# Altium PCB PCB_CONCENTRADOR.PcbDoc (part 3 of 3)
Units mm, origin at the board's own origin, x right, y up, seen from the top; angles counter-clockwise.
Board outline 90 x 100 mm, 2 copper layers (Top Layer, Bottom Layer); 69 components, 66 nets, 271 pads, 23 vias.
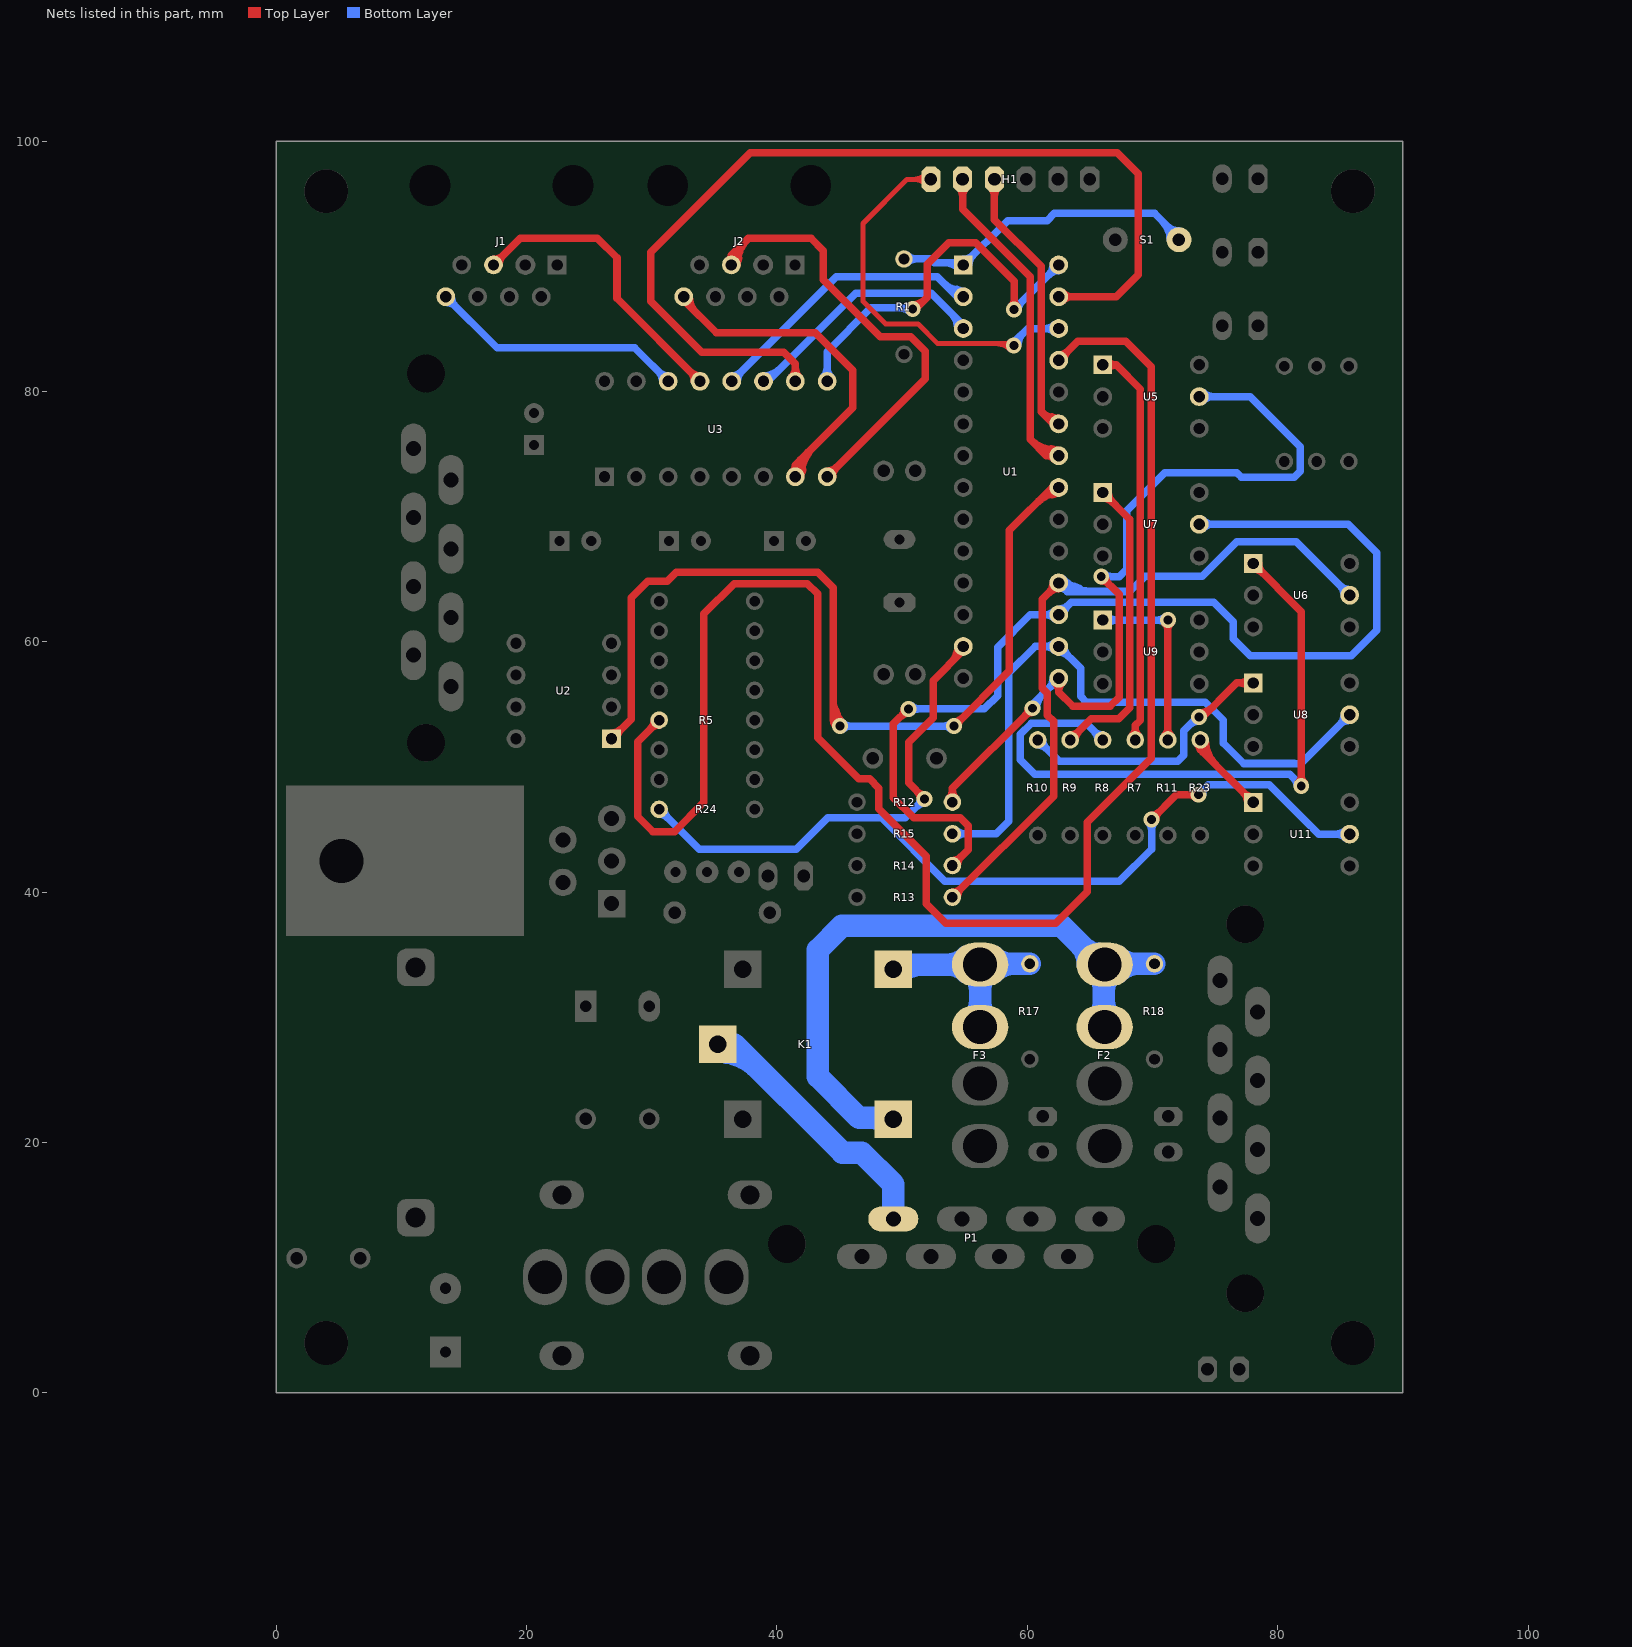
[diagram p3: the nets of this part, all layers, seen from the top]

## Via types
v1: diameter 1.27, hole 0.711, Top Layer to Bottom Layer, 22 vias
v2: diameter 2, hole 1, Top Layer to Bottom Layer, 1 vias

## Nets (pads, with @x,y where several pads share a name; then routed paths per layer and width w, separated by ;. In a path a pad name is that pad's centre, name@x,y a point inside that pad or via, vN(x,y) a via of type N, cw(c..) or ccw(c..) an arc to the next point about the centre after c; other vN are vias at no path point) (continued)
NetR1_2: R1.2 S1.2 U1.1 | length 51
  Bottom Layer w0.6: R1.2@50.15,90.585 52.272,90.585 52.557,90.3 54.7,90.3 U1.1@54.89,90.11 58.43,93.65 61.599,93.65 62.174,94.225 70.165,94.225 S1.2@72.115,92.275 ; R1.2@50.433,90.302 cw(c51.116,89.619) 51.116,90.585 ; R1.2@50.433,90.302 cw(c51.116,89.619) 51.116,90.585 ; R1.2@50.433,90.302 cw(c51.116,89.619) 51.116,90.585 ; R1.2@50.433,90.868 ccw(c51.116,91.551) 51.116,90.585 ; R1.2@50.433,90.868 ccw(c51.116,91.551) 51.116,90.585 ; R1.2@50.433,90.868 ccw(c51.116,91.551) 51.116,90.585 ; 53.345,90.3 cw(c53.345,88.565) U1.1@54.572,89.792 ; 53.345,90.3 cw(c53.345,88.565) U1.1@54.572,89.792 ; 53.345,90.3 cw(c53.345,88.565) U1.1@54.572,89.792 ; U1.1@54.89,90.56 ccw(c54.89,91.646) 55.658,90.878 ; U1.1@54.89,90.56 ccw(c54.89,91.646) 55.658,90.878 ; U1.1@54.89,90.56 ccw(c54.89,91.646) 55.658,90.878 ; U1.1@55.34,90.11 cw(c56.426,90.11) 55.658,90.878 ; U1.1@55.34,90.11 cw(c56.426,90.11) 55.658,90.878 ; U1.1@55.34,90.11 cw(c56.426,90.11) 55.658,90.878 ; 70.814,93.576 cw(c69.363,92.125) S1.2@71.415,92.125 ; 70.814,93.576 cw(c69.363,92.125) S1.2@71.415,92.125 ; 70.814,93.576 cw(c69.363,92.125) S1.2@71.415,92.125 ; 71.109,93.265 ccw(c72.542,93.649) S1.2@72.142,92.221 ; 71.109,93.265 ccw(c72.542,93.649) S1.2@72.142,92.221 ; 71.109,93.265 ccw(c72.542,93.649) S1.2@72.142,92.221 ; 71.176,93.214 ccw(c72.115,94.153) S1.2@72.115,92.825 ; 71.176,93.214 ccw(c72.115,94.153) S1.2@72.115,92.825 ; 71.176,93.214 ccw(c72.115,94.153) S1.2@72.115,92.825
NetR7_1: R7.1 U5.1 | length 41.5
  Top Layer w0.6: U5.1@66.033,82.128 67.097,82.128 ; R7.1@68.628,52.165 68.628,53.328 69.045,53.745 69.045,80.18 67.097,82.128 ; U5.1@66.355,81.814 cw(c67.097,81.094) 67.097,82.128 ; U5.1@66.355,81.814 cw(c67.097,81.094) 67.097,82.128 ; U5.1@66.355,81.814 cw(c67.097,81.094) 67.097,82.128 ; U5.1@66.355,82.441 ccw(c67.097,83.162) 67.097,82.128 ; U5.1@66.355,82.441 ccw(c67.097,83.162) 67.097,82.128 ; U5.1@66.355,82.441 ccw(c67.097,83.162) 67.097,82.128 ; R7.1@68.345,52.448 ccw(c67.663,53.131) 68.628,53.131 ; R7.1@68.345,52.448 ccw(c67.663,53.131) 68.628,53.131 ; R7.1@68.345,52.448 ccw(c67.663,53.131) 68.628,53.131 ; 68.628,53.131 ccw(c69.594,53.131) R7.1@68.911,52.448 ; 68.628,53.131 ccw(c69.594,53.131) R7.1@68.911,52.448 ; 68.628,53.131 ccw(c69.594,53.131) R7.1@68.911,52.448
NetR8_1: R8.1 U6.1 | length 69.5
  Top Layer w0.6: U6.1@78.048,66.264 81.889,62.423 v1(81.889,48.498) ; U6.1@78.048,65.814 cw(c78.048,64.728) 78.816,65.496 ; U6.1@78.048,65.814 cw(c78.048,64.728) 78.816,65.496 ; U6.1@78.048,65.814 cw(c78.048,64.728) 78.816,65.496 ; U6.1@78.498,66.264 ccw(c79.584,66.264) 78.816,65.496 ; U6.1@78.498,66.264 ccw(c79.584,66.264) 78.816,65.496 ; U6.1@78.498,66.264 ccw(c79.584,66.264) 78.816,65.496 ; v1@81.652,48.735 ccw(c81.08,49.307) 81.889,49.307 ; v1@81.652,48.735 ccw(c81.08,49.307) 81.889,49.307 ; v1@81.652,48.735 ccw(c81.08,49.307) 81.889,49.307 ; 81.889,49.307 ccw(c82.698,49.307) v1@82.126,48.735 ; 81.889,49.307 ccw(c82.698,49.307) v1@82.126,48.735 ; 81.889,49.307 ccw(c82.698,49.307) v1@82.126,48.735
  Bottom Layer w0.6: R8.1@66.03,52.165 64.695,53.5 60.339,53.5 59.45,52.611 59.45,50.575 60.6,49.425 74.115,49.425 74.119,49.429 80.958,49.429 v1(81.889,48.498) ; 65.347,52.848 cw(c64.664,52.165) R8.1@65.63,52.165 ; 65.347,52.848 ccw(c66.03,53.531) R8.1@66.03,52.565 ; 65.347,52.848 ccw(c66.03,53.531) R8.1@66.03,52.565 ; 65.347,52.848 cw(c64.664,52.165) R8.1@65.63,52.165 ; 65.347,52.848 ccw(c66.03,53.531) R8.1@66.03,52.565 ; 65.347,52.848 cw(c64.664,52.165) R8.1@65.63,52.165 ; 81.317,49.07 cw(c80.745,48.498) v1@81.554,48.498 ; 81.317,49.07 ccw(c81.889,49.642) v1@81.889,48.833 ; 81.317,49.07 ccw(c81.889,49.642) v1@81.889,48.833 ; 81.317,49.07 cw(c80.745,48.498) v1@81.554,48.498 ; 81.317,49.07 ccw(c81.889,49.642) v1@81.889,48.833 ; 81.317,49.07 cw(c80.745,48.498) v1@81.554,48.498
NetR9_1: R9.1 U7.1 | length 33.6
  Top Layer w0.6: R9.1@63.431,52.165 65.116,53.85 67.294,53.85 68.191,54.746 68.191,69.774 U7.1@66.033,71.932 ; R9.1@63.431,52.565 ccw(c63.431,53.531) 64.114,52.848 ; R9.1@63.431,52.565 ccw(c63.431,53.531) 64.114,52.848 ; R9.1@63.431,52.565 ccw(c63.431,53.531) 64.114,52.848 ; R9.1@63.831,52.165 cw(c64.797,52.165) 64.114,52.848 ; R9.1@63.831,52.165 cw(c64.797,52.165) 64.114,52.848 ; R9.1@63.831,52.165 cw(c64.797,52.165) 64.114,52.848 ; U7.1@66.033,71.482 cw(c66.033,70.396) 66.801,71.164 ; U7.1@66.033,71.482 cw(c66.033,70.396) 66.801,71.164 ; U7.1@66.033,71.482 cw(c66.033,70.396) 66.801,71.164 ; U7.1@66.483,71.932 ccw(c67.569,71.932) 66.801,71.164 ; U7.1@66.483,71.932 ccw(c67.569,71.932) 66.801,71.164 ; U7.1@66.483,71.932 ccw(c67.569,71.932) 66.801,71.164
NetR10_1: R10.1 U8.1 | length 38.1
  Top Layer w0.6: v1(73.729,54) 73.729,53.814 73.786,53.756 76.751,56.721 U8.1@78.048,56.721 ; v1@73.729,54.335 ccw(c73.729,55.872) 74.815,54.785 ; v1@73.729,54.335 ccw(c73.729,55.872) 74.815,54.785 ; v1@73.729,54.335 ccw(c73.729,55.872) 74.815,54.785 ; 76.961,56.721 cw(c76.961,55.635) U8.1@77.729,56.403 ; 76.961,56.721 ccw(c76.961,57.807) U8.1@77.729,57.039 ; 76.961,56.721 ccw(c76.961,57.807) U8.1@77.729,57.039 ; 76.961,56.721 cw(c76.961,55.635) U8.1@77.729,56.403 ; 76.961,56.721 ccw(c76.961,57.807) U8.1@77.729,57.039 ; 76.961,56.721 cw(c76.961,55.635) U8.1@77.729,56.403
  Bottom Layer w0.6: R10.1@60.833,52.165 62.548,50.45 72.004,50.45 72.5,50.946 72.5,52.9 73.356,53.756 73.786,53.756 73.729,53.814 v1(73.729,54) ; R10.1@60.833,51.765 cw(c60.833,50.799) 61.516,51.482 ; R10.1@60.833,51.765 cw(c60.833,50.799) 61.516,51.482 ; R10.1@60.833,51.765 cw(c60.833,50.799) 61.516,51.482 ; R10.1@61.233,52.165 ccw(c62.199,52.165) 61.516,51.482 ; R10.1@61.233,52.165 ccw(c62.199,52.165) 61.516,51.482 ; R10.1@61.233,52.165 ccw(c62.199,52.165) 61.516,51.482 ; 72.937,53.337 cw(c73.729,52.546) v1@73.729,53.665 ; 72.937,53.337 cw(c73.729,52.546) v1@73.729,53.665 ; 72.937,53.337 cw(c73.729,52.546) v1@73.729,53.665
NetR11_1: R11.1 U9.1 | length 32.1
  Top Layer w0.6: R11.1@71.227,52.165 v1(71.227,61.737) ; R11.1@70.944,52.448 ccw(c70.261,53.131) 71.227,53.131 ; R11.1@70.944,52.448 ccw(c70.261,53.131) 71.227,53.131 ; R11.1@70.944,52.448 ccw(c70.261,53.131) 71.227,53.131 ; v1@70.99,61.5 cw(c70.418,60.928) 71.227,60.928 ; v1@70.99,61.5 cw(c70.418,60.928) 71.227,60.928 ; v1@70.99,61.5 cw(c70.418,60.928) 71.227,60.928 ; 71.227,53.131 ccw(c72.192,53.131) R11.1@71.509,52.448 ; 71.227,53.131 ccw(c72.192,53.131) R11.1@71.509,52.448 ; 71.227,53.131 ccw(c72.192,53.131) R11.1@71.509,52.448 ; 71.227,60.928 cw(c72.035,60.928) v1@71.464,61.5 ; 71.227,60.928 cw(c72.035,60.928) v1@71.464,61.5 ; 71.227,60.928 cw(c72.035,60.928) v1@71.464,61.5
  Bottom Layer w0.6: U9.1@66.033,61.737 v1(71.227,61.737) ; U9.1@66.351,61.419 cw(c67.119,60.651) 67.119,61.737 ; U9.1@66.351,61.419 cw(c67.119,60.651) 67.119,61.737 ; U9.1@66.351,61.419 cw(c67.119,60.651) 67.119,61.737 ; U9.1@66.351,62.055 ccw(c67.119,62.823) 67.119,61.737 ; U9.1@66.351,62.055 ccw(c67.119,62.823) 67.119,61.737 ; U9.1@66.351,62.055 ccw(c67.119,62.823) 67.119,61.737 ; 70.418,61.737 cw(c70.418,60.928) v1@70.99,61.5 ; 70.418,61.737 ccw(c70.418,62.546) v1@70.99,61.974 ; 70.418,61.737 ccw(c70.418,62.546) v1@70.99,61.974 ; 70.418,61.737 cw(c70.418,60.928) v1@70.99,61.5 ; 70.418,61.737 ccw(c70.418,62.546) v1@70.99,61.974 ; 70.418,61.737 cw(c70.418,60.928) v1@70.99,61.5
NetR23_1: R23.1 U11.1 | length 24.8
  Top Layer w0.6: R23.1@73.825,52.165 73.825,51.401 ; U11.1@78.048,47.178 73.825,51.401 ; R23.1@73.597,51.836 cw(c73.295,51.401) 73.825,51.401 ; R23.1@73.597,51.836 cw(c73.295,51.401) 73.825,51.401 ; R23.1@73.597,51.836 cw(c73.295,51.401) 73.825,51.401 ; R23.1@73.625,52.165 ccw(c74.988,52.165) 74.024,51.201 ; R23.1@73.625,52.165 ccw(c74.988,52.165) 74.024,51.201 ; R23.1@73.625,52.165 ccw(c74.988,52.165) 74.024,51.201 ; 73.825,51.401 cw(c74.356,51.401) R23.1@74.053,51.836 ; 73.825,51.401 cw(c74.356,51.401) R23.1@74.053,51.836 ; 73.825,51.401 cw(c74.356,51.401) R23.1@74.053,51.836 ; R23.1@74.225,52.165 ccw(c77.036,52.165) 75.048,50.177 ; R23.1@74.225,52.165 ccw(c77.036,52.165) 75.048,50.177 ; R23.1@74.225,52.165 ccw(c77.036,52.165) 75.048,50.177 ; 77.279,47.946 cw(c76.511,47.178) U11.1@77.598,47.178 ; 77.279,47.946 ccw(c78.048,48.714) U11.1@78.048,47.628 ; 77.279,47.946 ccw(c78.048,48.714) U11.1@78.048,47.628 ; 77.279,47.946 cw(c76.511,47.178) U11.1@77.598,47.178 ; 77.279,47.946 ccw(c78.048,48.714) U11.1@78.048,47.628 ; 77.279,47.946 cw(c76.511,47.178) U11.1@77.598,47.178
OPTO2: R12.2 U1.15 U5.7 | length 99.4
  Top Layer w0.6: R12.2@54.02,47.2 54.02,48.29 v1(60.426,54.696) ; U1.15@62.51,57.09 62.51,55.99 63.625,54.875 66.625,54.875 67.337,55.587 67.337,63.787 v1(65.912,65.211) ; R12.2@53.737,47.483 ccw(c53.054,48.166) 54.02,48.166 ; R12.2@53.737,47.483 ccw(c53.054,48.166) 54.02,48.166 ; R12.2@53.737,47.483 ccw(c53.054,48.166) 54.02,48.166 ; 54.02,48.166 ccw(c54.986,48.166) R12.2@54.303,47.483 ; 54.02,48.166 ccw(c54.986,48.166) R12.2@54.303,47.483 ; 54.02,48.166 ccw(c54.986,48.166) R12.2@54.303,47.483 ; 59.854,54.124 cw(c60.426,53.552) v1@60.426,54.361 ; 59.854,54.124 ccw(c59.282,54.696) v1@60.091,54.696 ; 59.854,54.124 ccw(c59.282,54.696) v1@60.091,54.696 ; 59.854,54.124 cw(c60.426,53.552) v1@60.426,54.361 ; 59.854,54.124 ccw(c59.282,54.696) v1@60.091,54.696 ; 59.854,54.124 cw(c60.426,53.552) v1@60.426,54.361 ; U1.15@62.192,56.772 cw(c61.424,56.004) 62.51,56.004 ; U1.15@62.192,56.772 cw(c61.424,56.004) 62.51,56.004 ; U1.15@62.192,56.772 cw(c61.424,56.004) 62.51,56.004 ; 62.51,56.004 cw(c63.596,56.004) U1.15@62.828,56.772 ; 62.51,56.004 cw(c63.596,56.004) U1.15@62.828,56.772 ; 62.51,56.004 cw(c63.596,56.004) U1.15@62.828,56.772 ; v1@65.912,64.876 cw(c65.912,64.068) 66.484,64.64 ; v1@65.912,64.876 cw(c65.912,64.068) 66.484,64.64 ; v1@65.912,64.876 cw(c65.912,64.068) 66.484,64.64 ; v1@66.247,65.211 ccw(c67.056,65.211) 66.484,64.64 ; v1@66.247,65.211 ccw(c67.056,65.211) 66.484,64.64 ; v1@66.247,65.211 ccw(c67.056,65.211) 66.484,64.64
  Bottom Layer w0.6: v1(60.426,54.696) 60.426,55.006 U1.15@62.51,57.09 ; v1(65.912,65.211) 67.336,65.211 67.944,65.819 67.944,70.469 71,73.525 76.725,73.525 77.114,73.136 81.311,73.136 81.813,73.638 81.813,75.6 77.825,79.588 U5.7@73.738,79.588 ; v1@60.761,54.696 cw(c62.318,54.696) 61.217,55.797 ; v1@60.761,54.696 cw(c62.318,54.696) 61.217,55.797 ; v1@60.761,54.696 cw(c62.318,54.696) 61.217,55.797 ; 61.742,56.322 cw(c62.51,55.554) U1.15@62.51,56.64 ; 61.742,56.322 ccw(c60.974,57.09) U1.15@62.06,57.09 ; 61.742,56.322 ccw(c60.974,57.09) U1.15@62.06,57.09 ; 61.742,56.322 cw(c62.51,55.554) U1.15@62.51,56.64 ; 61.742,56.322 ccw(c60.974,57.09) U1.15@62.06,57.09 ; 61.742,56.322 cw(c62.51,55.554) U1.15@62.51,56.64 ; v1@66.149,64.975 cw(c66.721,64.403) 66.721,65.211 ; v1@66.149,64.975 cw(c66.721,64.403) 66.721,65.211 ; v1@66.149,64.975 cw(c66.721,64.403) 66.721,65.211 ; v1@66.149,65.448 ccw(c66.721,66.02) 66.721,65.211 ; v1@66.149,65.448 ccw(c66.721,66.02) 66.721,65.211 ; v1@66.149,65.448 ccw(c66.721,66.02) 66.721,65.211 ; U5.7@74.057,79.27 cw(c74.825,78.502) 74.825,79.588 ; U5.7@74.057,79.27 cw(c74.825,78.502) 74.825,79.588 ; U5.7@74.057,79.27 cw(c74.825,78.502) 74.825,79.588 ; U5.7@74.057,79.906 ccw(c74.825,80.674) 74.825,79.588 ; U5.7@74.057,79.906 ccw(c74.825,80.674) 74.825,79.588 ; U5.7@74.057,79.906 ccw(c74.825,80.674) 74.825,79.588
OPTO3: R13.2 U1.18 U6.7 | length 92.2
  Top Layer w0.6: R13.2@54.02,39.6 62.102,47.682 62.102,53.654 61.615,54.142 61.615,55.877 61.188,56.304 61.188,63.388 U1.18@62.51,64.71 ; R13.2@54.02,40 ccw(c54.02,40.966) 54.703,40.283 ; R13.2@54.02,40 ccw(c54.02,40.966) 54.703,40.283 ; R13.2@54.02,40 ccw(c54.02,40.966) 54.703,40.283 ; R13.2@54.42,39.6 cw(c55.386,39.6) 54.703,40.283 ; R13.2@54.42,39.6 cw(c55.386,39.6) 54.703,40.283 ; R13.2@54.42,39.6 cw(c55.386,39.6) 54.703,40.283 ; 61.742,63.942 cw(c62.51,63.174) U1.18@62.51,64.26 ; 61.742,63.942 ccw(c60.974,64.71) U1.18@62.06,64.71 ; 61.742,63.942 ccw(c60.974,64.71) U1.18@62.06,64.71 ; 61.742,63.942 cw(c62.51,63.174) U1.18@62.51,64.26 ; 61.742,63.942 ccw(c60.974,64.71) U1.18@62.06,64.71 ; 61.742,63.942 cw(c62.51,63.174) U1.18@62.51,64.26
  Bottom Layer w0.6: U1.18@62.51,64.71 63.198,64.022 68.191,64.022 69.414,65.246 73.988,65.246 76.722,67.98 81.497,67.98 U6.7@85.753,63.724 ; U1.18@62.404,64.604 ccw(c63.808,66.008) 63.808,64.022 ; U1.18@62.404,64.604 ccw(c63.808,66.008) 63.808,64.022 ; U1.18@62.404,64.604 ccw(c63.808,66.008) 63.808,64.022 ; U1.18@62.627,64.275 cw(c62.78,63.704) 63.076,64.216 ; U1.18@62.627,64.275 cw(c62.78,63.704) 63.076,64.216 ; U1.18@62.627,64.275 cw(c62.78,63.704) 63.076,64.216 ; U1.18@62.712,64.308 cw(c63.391,62.95) 64.15,64.265 ; U1.18@62.712,64.308 cw(c63.391,62.95) 64.15,64.265 ; U1.18@62.712,64.308 cw(c63.391,62.95) 64.15,64.265 ; U1.18@62.828,65.028 ccw(c65.257,67.456) 65.257,64.022 ; U1.18@62.828,65.028 ccw(c65.257,67.456) 65.257,64.022 ; U1.18@62.828,65.028 ccw(c65.257,67.456) 65.257,64.022 ; U1.18@62.96,64.726 ccw(c63.774,64.754) 63.366,64.048 ; U1.18@62.96,64.726 ccw(c63.774,64.754) 63.366,64.048 ; U1.18@62.96,64.726 ccw(c63.774,64.754) 63.366,64.048 ; 84.985,64.492 cw(c84.217,63.724) U6.7@85.303,63.724 ; 84.985,64.492 ccw(c85.753,65.26) U6.7@85.753,64.174 ; 84.985,64.492 ccw(c85.753,65.26) U6.7@85.753,64.174 ; 84.985,64.492 cw(c84.217,63.724) U6.7@85.303,63.724 ; 84.985,64.492 ccw(c85.753,65.26) U6.7@85.753,64.174 ; 84.985,64.492 cw(c84.217,63.724) U6.7@85.303,63.724
OPTO4: R14.2 U1.17 U7.7 | length 113.6
  Top Layer w0.6: v1(50.517,54.645) 49.313,53.441 49.313,47.538 50.918,45.933 54.66,45.933 55.295,45.298 55.295,43.408 R14.2@54.02,42.133 ; 49.945,54.073 cw(c50.517,53.501) v1@50.517,54.31 ; 49.945,54.073 ccw(c49.373,54.645) v1@50.182,54.645 ; 49.945,54.073 ccw(c49.373,54.645) v1@50.182,54.645 ; 49.945,54.073 cw(c50.517,53.501) v1@50.517,54.31 ; 49.945,54.073 ccw(c49.373,54.645) v1@50.182,54.645 ; 49.945,54.073 cw(c50.517,53.501) v1@50.517,54.31 ; R14.2@54.02,42.533 ccw(c54.02,43.499) 54.703,42.816 ; R14.2@54.02,42.533 ccw(c54.02,43.499) 54.703,42.816 ; R14.2@54.02,42.533 ccw(c54.02,43.499) 54.703,42.816 ; R14.2@54.42,42.133 cw(c55.386,42.133) 54.703,42.816 ; R14.2@54.42,42.133 cw(c55.386,42.133) 54.703,42.816 ; R14.2@54.42,42.133 cw(c55.386,42.133) 54.703,42.816
  Bottom Layer w0.6: v1(50.517,54.645) 56.57,54.645 57.625,55.7 57.625,59.575 60.22,62.17 U1.17@62.51,62.17 63.508,63.168 74.907,63.168 76.453,61.622 76.453,60.247 77.8,58.9 85.875,58.9 87.9,60.925 87.9,67.125 85.633,69.392 U7.7@73.738,69.392 ; v1@50.754,54.408 cw(c51.326,53.836) 51.326,54.645 ; v1@50.754,54.408 cw(c51.326,53.836) 51.326,54.645 ; v1@50.754,54.408 cw(c51.326,53.836) 51.326,54.645 ; v1@50.754,54.882 ccw(c51.326,55.454) 51.326,54.645 ; v1@50.754,54.882 ccw(c51.326,55.454) 51.326,54.645 ; v1@50.754,54.882 ccw(c51.326,55.454) 51.326,54.645 ; 61.424,62.17 cw(c61.424,61.084) U1.17@62.192,61.852 ; 61.424,62.17 ccw(c61.424,63.256) U1.17@62.192,62.488 ; 61.424,62.17 ccw(c61.424,63.256) U1.17@62.192,62.488 ; 61.424,62.17 cw(c61.424,61.084) U1.17@62.192,61.852 ; 61.424,62.17 ccw(c61.424,63.256) U1.17@62.192,62.488 ; 61.424,62.17 cw(c61.424,61.084) U1.17@62.192,61.852 ; U1.17@62.51,62.62 ccw(c62.51,63.706) 63.278,62.938 ; U1.17@62.51,62.62 ccw(c62.51,63.706) 63.278,62.938 ; U1.17@62.51,62.62 ccw(c62.51,63.706) 63.278,62.938 ; U1.17@62.96,62.17 cw(c64.046,62.17) 63.278,62.938 ; U1.17@62.96,62.17 cw(c64.046,62.17) 63.278,62.938 ; U1.17@62.96,62.17 cw(c64.046,62.17) 63.278,62.938 ; U7.7@74.057,69.074 cw(c74.825,68.306) 74.825,69.392 ; U7.7@74.057,69.074 cw(c74.825,68.306) 74.825,69.392 ; U7.7@74.057,69.074 cw(c74.825,68.306) 74.825,69.392 ; U7.7@74.057,69.711 ccw(c74.825,70.479) 74.825,69.392 ; U7.7@74.057,69.711 ccw(c74.825,70.479) 74.825,69.392 ; U7.7@74.057,69.711 ccw(c74.825,70.479) 74.825,69.392
OPTO5: R15.2 U1.16 U8.7 | length 72.7
  Bottom Layer w0.6: R15.2@54.02,44.667 57.534,44.667 58.525,45.658 58.525,57.525 60.63,59.63 U1.16@62.51,59.63 64.261,57.879 64.261,55.639 64.711,55.189 74.221,55.189 75.675,53.735 75.675,51.903 77.295,50.283 81.312,50.283 81.32,50.275 81.847,50.275 U8.7@85.753,54.181 ; R15.2@54.303,44.384 cw(c54.986,43.701) 54.986,44.667 ; R15.2@54.303,44.384 cw(c54.986,43.701) 54.986,44.667 ; R15.2@54.303,44.384 cw(c54.986,43.701) 54.986,44.667 ; R15.2@54.303,44.95 ccw(c54.986,45.632) 54.986,44.667 ; R15.2@54.303,44.95 ccw(c54.986,45.632) 54.986,44.667 ; R15.2@54.303,44.95 ccw(c54.986,45.632) 54.986,44.667 ; 61.424,59.63 cw(c61.424,58.544) U1.16@62.192,59.312 ; 61.424,59.63 ccw(c61.424,60.716) U1.16@62.192,59.948 ; 61.424,59.63 ccw(c61.424,60.716) U1.16@62.192,59.948 ; 61.424,59.63 cw(c61.424,58.544) U1.16@62.192,59.312 ; 61.424,59.63 ccw(c61.424,60.716) U1.16@62.192,59.948 ; 61.424,59.63 cw(c61.424,58.544) U1.16@62.192,59.312 ; U1.16@62.51,59.18 cw(c62.51,58.094) 63.278,58.862 ; U1.16@62.51,59.18 cw(c62.51,58.094) 63.278,58.862 ; U1.16@62.51,59.18 cw(c62.51,58.094) 63.278,58.862 ; U1.16@62.96,59.63 ccw(c64.046,59.63) 63.278,58.862 ; U1.16@62.96,59.63 ccw(c64.046,59.63) 63.278,58.862 ; U1.16@62.96,59.63 ccw(c64.046,59.63) 63.278,58.862 ; 84.985,53.413 cw(c85.753,52.645) U8.7@85.753,53.731 ; 84.985,53.413 ccw(c84.217,54.181) U8.7@85.303,54.181 ; 84.985,53.413 ccw(c84.217,54.181) U8.7@85.303,54.181 ; 84.985,53.413 cw(c85.753,52.645) U8.7@85.753,53.731 ; 84.985,53.413 ccw(c84.217,54.181) U8.7@85.303,54.181 ; 84.985,53.413 cw(c85.753,52.645) U8.7@85.753,53.731
OPTO6: R24.2 U1.13 U11.7 | length 121.3
  Top Layer w0.6: v1(51.79,47.457) 50.52,48.727 50.52,51.965 52.476,53.921 52.476,56.901 54.89,59.315 U1.13@54.89,59.63 ; v1(69.925,45.806) 71.907,47.787 v1(73.685,47.787) ; 51.218,48.029 cw(c50.646,47.457) v1@51.455,47.457 ; 51.218,48.029 ccw(c51.79,48.601) v1@51.79,47.792 ; 51.218,48.029 ccw(c51.79,48.601) v1@51.79,47.792 ; 51.218,48.029 cw(c50.646,47.457) v1@51.455,47.457 ; 51.218,48.029 ccw(c51.79,48.601) v1@51.79,47.792 ; 51.218,48.029 cw(c50.646,47.457) v1@51.455,47.457 ; 53.899,58.324 ccw(c52.593,59.63) U1.13@54.44,59.63 ; 53.899,58.324 ccw(c52.593,59.63) U1.13@54.44,59.63 ; 53.899,58.324 ccw(c52.593,59.63) U1.13@54.44,59.63 ; v1@69.925,46.141 ccw(c69.925,46.95) 70.497,46.378 ; v1@69.925,46.141 ccw(c69.925,46.95) 70.497,46.378 ; v1@69.925,46.141 ccw(c69.925,46.95) 70.497,46.378 ; v1@70.26,45.806 cw(c71.069,45.806) 70.497,46.378 ; v1@70.26,45.806 cw(c71.069,45.806) 70.497,46.378 ; v1@70.26,45.806 cw(c71.069,45.806) 70.497,46.378 ; 72.876,47.787 cw(c72.876,46.978) v1@73.448,47.55 ; 72.876,47.787 ccw(c72.876,48.596) v1@73.448,48.024 ; 72.876,47.787 ccw(c72.876,48.596) v1@73.448,48.024 ; 72.876,47.787 cw(c72.876,46.978) v1@73.448,47.55 ; 72.876,47.787 ccw(c72.876,48.596) v1@73.448,48.024 ; 72.876,47.787 cw(c72.876,46.978) v1@73.448,47.55
  Bottom Layer w0.6: R24.2@30.6,46.625 33.8,43.425 41.55,43.425 44.058,45.933 48.361,45.933 ; v1(51.79,47.457) 50.266,45.933 48.361,45.933 ; v1(69.925,45.806) 69.925,43.444 67.36,40.878 53.415,40.878 48.361,45.933 ; v1(73.685,47.787) 74.473,48.575 79.332,48.575 83.269,44.638 U11.7@85.753,44.638 ; R24.2@30.6,46.225 cw(c30.6,45.259) 31.283,45.942 ; R24.2@30.6,46.225 cw(c30.6,45.259) 31.283,45.942 ; R24.2@30.6,46.225 cw(c30.6,45.259) 31.283,45.942 ; R24.2@31,46.625 ccw(c31.966,46.625) 31.283,45.942 ; R24.2@31,46.625 ccw(c31.966,46.625) 31.283,45.942 ; R24.2@31,46.625 ccw(c31.966,46.625) 31.283,45.942 ; 51.218,46.885 cw(c51.79,46.313) v1@51.79,47.122 ; 51.218,46.885 ccw(c50.646,47.457) v1@51.455,47.457 ; 51.218,46.885 ccw(c50.646,47.457) v1@51.455,47.457 ; 51.218,46.885 cw(c51.79,46.313) v1@51.79,47.122 ; 51.218,46.885 ccw(c50.646,47.457) v1@51.455,47.457 ; 51.218,46.885 cw(c51.79,46.313) v1@51.79,47.122 ; v1@69.689,45.569 cw(c69.117,44.997) 69.925,44.997 ; v1@69.689,45.569 cw(c69.117,44.997) 69.925,44.997 ; v1@69.689,45.569 cw(c69.117,44.997) 69.925,44.997 ; 69.925,44.997 cw(c70.734,44.997) v1@70.162,45.569 ; 69.925,44.997 cw(c70.734,44.997) v1@70.162,45.569 ; 69.925,44.997 cw(c70.734,44.997) v1@70.162,45.569 ; v1@73.685,48.122 ccw(c73.685,48.931) 74.256,48.359 ; v1@73.685,48.122 ccw(c73.685,48.931) 74.256,48.359 ; v1@73.685,48.122 ccw(c73.685,48.931) 74.256,48.359 ; v1@74.02,47.787 cw(c74.828,47.787) 74.256,48.359 ; v1@74.02,47.787 cw(c74.828,47.787) 74.256,48.359 ; v1@74.02,47.787 cw(c74.828,47.787) 74.256,48.359 ; 84.667,44.638 cw(c84.667,43.552) U11.7@85.435,44.32 ; 84.667,44.638 ccw(c84.667,45.724) U11.7@85.435,44.956 ; 84.667,44.638 ccw(c84.667,45.724) U11.7@85.435,44.956 ; 84.667,44.638 cw(c84.667,43.552) U11.7@85.435,44.32 ; 84.667,44.638 ccw(c84.667,45.724) U11.7@85.435,44.956 ; 84.667,44.638 cw(c84.667,43.552) U11.7@85.435,44.32
RELE1: R5.1 U1.25 | length 146.6
  Top Layer w0.6: R5.1@30.6,53.75 28.875,52.025 28.875,46.05 30.075,44.85 31.825,44.85 34.175,47.2 34.175,62.227 36.598,64.65 42.425,64.65 43.25,63.825 43.25,52.325 46.525,49.05 47.4,49.05 48.15,48.3 48.15,46.65 51.915,42.885 51.915,39.085 53.475,37.525 62.275,37.525 64.775,40.025 64.775,45.575 69.9,50.7 69.9,81.975 67.85,84.025 64.045,84.025 U1.25@62.51,82.49 ; 29.917,53.067 cw(c30.6,52.384) R5.1@30.6,53.35 ; 29.917,53.067 ccw(c29.234,53.75) R5.1@30.2,53.75 ; 29.917,53.067 ccw(c29.234,53.75) R5.1@30.2,53.75 ; 29.917,53.067 cw(c30.6,52.384) R5.1@30.6,53.35 ; 29.917,53.067 ccw(c29.234,53.75) R5.1@30.2,53.75 ; 29.917,53.067 cw(c30.6,52.384) R5.1@30.6,53.35 ; U1.25@62.51,82.94 ccw(c62.51,84.026) 63.278,83.258 ; U1.25@62.51,82.94 ccw(c62.51,84.026) 63.278,83.258 ; U1.25@62.51,82.94 ccw(c62.51,84.026) 63.278,83.258 ; U1.25@62.96,82.49 cw(c64.046,82.49) 63.278,83.258 ; U1.25@62.96,82.49 cw(c64.046,82.49) 63.278,83.258 ; U1.25@62.96,82.49 cw(c64.046,82.49) 63.278,83.258
RELE1C: K1.1 P1.1@49.3,13.9 | length 31.3
  Bottom Layer w1.8: K1.1@35.285,27.854 36.571,27.854 45.225,19.2 46.775,19.2 49.3,16.675 P1.1@49.3,13.9 ; K1.1@35.805,28.154 ccw(c38.773,29.868) 37.886,26.557 ; K1.1@35.285,27.254 cw(c35.285,22.701) 38.504,25.921 ccw(c35.285,22.701) K1.1@35.285,27.254
RELE1NC: F3.1 K1.2 R17.1 | length 46.2
  Bottom Layer w1.8: K1.2@49.285,33.854 49.656,34.225 F3.1@56.235,34.225 ; F3.1@56.235,29.225 F3.1@56.235,34.225 ; R17.1@60.21,34.285 56.295,34.285 F3.1@56.235,34.225 ; 53.683,34.225 ccw(c53.683,36.277) 55.134,34.826 cw(c53.683,36.277) 53.683,34.225 ; 53.683,34.225 cw(c53.683,32.173) 55.134,33.624 ccw(c53.683,32.173) 53.683,34.225 ; 56.235,31.277 ccw(c58.287,31.277) 56.836,29.826 cw(c58.287,31.277) 56.235,31.277 ; 56.235,31.277 cw(c54.183,31.277) 55.634,29.826 ccw(c54.183,31.277) 56.235,31.277 ; 56.235,32.173 ccw(c54.183,32.173) 55.634,33.624 cw(c54.183,32.173) 56.235,32.173 ; 56.235,32.173 cw(c58.287,32.173) 56.836,33.624 ccw(c58.287,32.173) 56.235,32.173 ; K1.2@49.709,33.43 cw(c51.629,31.51) 51.629,34.225 ccw(c51.629,31.51) K1.2@49.709,33.43 ; F3.1@57.336,33.624 cw(c58.932,32.028) 58.932,34.285 ccw(c58.932,32.028) F3.1@57.336,33.624 ; F3.1@57.336,34.826 ccw(c58.642,36.132) 58.642,34.285 cw(c58.642,36.132) F3.1@57.336,34.826
RELE1NO: F2.1 K1.3 R18.1 | length 81.1
  Bottom Layer w1.8: K1.3@49.285,21.854 49.16,21.979 46.576,21.979 43.275,25.28 43.275,35.4 45.199,37.324 62.736,37.324 F2.1@65.411,34.649 ; F2.1@64.87,35.31 66.1,34.08 F2.1@66.1,29 ; F2.1@66.185,34.225 66.245,34.285 R18.1@70.16,34.285 ; 47.535,21.979 cw(c47.535,20.104) 48.861,21.43 ccw(c47.535,20.104) 47.535,21.979 ; 64.128,35.932 cw(c62.421,34.225) 64.835,34.225 ccw(c62.421,34.225) 64.128,35.932 ; 64.49,35.57 ccw(c65.685,36.765) 65.685,35.075 cw(c65.685,36.765) 64.49,35.57 ; F2.1@65.584,29.826 ccw(c64.338,31.072) 66.1,31.072 cw(c64.338,31.072) F2.1@65.584,29.826 ; F2.1@65.584,33.624 cw(c64.338,32.378) 66.1,32.378 ccw(c64.338,32.378) F2.1@65.584,33.624 ; 66.1,31.482 ccw(c68.443,31.482) 66.786,29.826 cw(c68.443,31.482) 66.1,31.482 ; 66.1,31.968 cw(c68.443,31.968) 66.786,33.624 ccw(c68.443,31.968) 66.1,31.968 ; F2.1@67.286,33.624 cw(c68.882,32.028) 68.882,34.285 ccw(c68.882,32.028) F2.1@67.286,33.624 ; F2.1@67.286,34.826 ccw(c68.592,36.132) 68.592,34.285 cw(c68.592,36.132) F2.1@67.286,34.826
RO1_485: U1.21 U2.1 | length 113.1
  Top Layer w0.6: U2.1@26.785,52.265 28.35,53.83 28.35,63.525 29.675,64.85 31.225,64.85 31.95,65.575 43.247,65.575 44.5,64.322 44.5,53.807 ; v1(45.033,53.273) 44.5,53.807 ; v1(54.152,53.273) 58.575,57.696 58.575,68.9 62.005,72.33 U1.21@62.51,72.33 ; U2.1@26.785,52.715 ccw(c26.785,53.801) 27.553,53.033 ; U2.1@26.785,52.715 ccw(c26.785,53.801) 27.553,53.033 ; U2.1@26.785,52.715 ccw(c26.785,53.801) 27.553,53.033 ; U2.1@27.235,52.265 cw(c28.321,52.265) 27.553,53.033 ; U2.1@27.235,52.265 cw(c28.321,52.265) 27.553,53.033 ; U2.1@27.235,52.265 cw(c28.321,52.265) 27.553,53.033 ; 44.5,53.807 cw(c44.018,53.325) v1@44.699,53.29 ; 44.5,53.807 ccw(c44.982,54.289) v1@45.017,53.608 ; 44.5,53.807 ccw(c44.982,54.289) v1@45.017,53.608 ; 44.5,53.807 cw(c44.018,53.325) v1@44.699,53.29 ; 44.5,53.807 ccw(c44.982,54.289) v1@45.017,53.608 ; 44.5,53.807 cw(c44.018,53.325) v1@44.699,53.29 ; 44.5,53.921 ccw(c45.681,53.921) v1@44.846,53.086 ; 44.5,53.921 ccw(c45.681,53.921) v1@44.846,53.086 ; 44.5,53.921 ccw(c45.681,53.921) v1@44.846,53.086 ; 44.5,55.37 ccw(c47.13,55.37) v1@45.27,53.51 ; 44.5,55.37 ccw(c47.13,55.37) v1@45.27,53.51 ; 44.5,55.37 ccw(c47.13,55.37) v1@45.27,53.51 ; 44.683,54.527 cw(c43.642,53.926) v1@44.73,53.416 ; 44.683,54.527 cw(c43.642,53.926) v1@44.73,53.416 ; 44.683,54.527 cw(c43.642,53.926) v1@44.73,53.416 ; v1@54.152,53.608 ccw(c54.152,54.417) 54.724,53.845 ; v1@54.152,53.608 ccw(c54.152,54.417) 54.724,53.845 ; v1@54.152,53.608 ccw(c54.152,54.417) 54.724,53.845 ; v1@54.487,53.273 cw(c55.296,53.273) 54.724,53.845 ; v1@54.487,53.273 cw(c55.296,53.273) 54.724,53.845 ; v1@54.487,53.273 cw(c55.296,53.273) 54.724,53.845 ; 60.88,71.205 cw(c62.51,69.574) U1.21@62.51,71.88 ; 60.88,71.205 cw(c62.51,69.574) U1.21@62.51,71.88 ; 60.88,71.205 cw(c62.51,69.574) U1.21@62.51,71.88 ; 61.981,71.738 ccw(c61.705,72.768) U1.21@62.642,72.258 ; 61.981,71.738 ccw(c61.705,72.768) U1.21@62.642,72.258 ; 61.981,71.738 ccw(c61.705,72.768) U1.21@62.642,72.258
  Bottom Layer w0.6: v1(45.033,53.273) v1(54.152,53.273) ; v1@45.27,53.037 cw(c45.842,52.465) 45.842,53.273 ; v1@45.27,53.037 cw(c45.842,52.465) 45.842,53.273 ; v1@45.27,53.037 cw(c45.842,52.465) 45.842,53.273 ; v1@45.27,53.51 ccw(c45.842,54.082) 45.842,53.273 ; v1@45.27,53.51 ccw(c45.842,54.082) 45.842,53.273 ; v1@45.27,53.51 ccw(c45.842,54.082) 45.842,53.273 ; 53.343,53.273 cw(c53.343,52.465) v1@53.915,53.037 ; 53.343,53.273 ccw(c53.343,54.082) v1@53.915,53.51 ; 53.343,53.273 ccw(c53.343,54.082) v1@53.915,53.51 ; 53.343,53.273 cw(c53.343,52.465) v1@53.915,53.037 ; 53.343,53.273 ccw(c53.343,54.082) v1@53.915,53.51 ; 53.343,53.273 cw(c53.343,52.465) v1@53.915,53.037
RS232_RX_MONITOREO: J1.5 U3.13 | length 34.2
  Top Layer w0.6: J1.5@17.365,90.11 19.492,92.237 25.663,92.237 27.228,90.672 27.228,87.437 U3.13@33.855,80.81 ; J1.5@17.365,90.56 ccw(c17.365,91.646) 18.133,90.878 ; J1.5@17.365,90.56 ccw(c17.365,91.646) 18.133,90.878 ; J1.5@17.365,90.56 ccw(c17.365,91.646) 18.133,90.878 ; J1.5@17.815,90.11 cw(c18.901,90.11) 18.133,90.878 ; J1.5@17.815,90.11 cw(c18.901,90.11) 18.133,90.878 ; J1.5@17.815,90.11 cw(c18.901,90.11) 18.133,90.878 ; 33.087,81.578 cw(c32.319,80.81) U3.13@33.405,80.81 ; 33.087,81.578 ccw(c33.855,82.346) U3.13@33.855,81.26 ; 33.087,81.578 ccw(c33.855,82.346) U3.13@33.855,81.26 ; 33.087,81.578 cw(c32.319,80.81) U3.13@33.405,80.81 ; 33.087,81.578 ccw(c33.855,82.346) U3.13@33.855,81.26 ; 33.087,81.578 cw(c32.319,80.81) U3.13@33.405,80.81
RS232_RXPC: J2.5 U3.8 | length 55.9
  Top Layer w0.6: J2.5@36.365,90.11 36.365,90.865 ; U3.8@44.015,73.19 51.85,81.025 51.85,83.225 50.7,84.375 48.25,84.375 43.7,88.925 43.7,91.25 42.725,92.225 37.725,92.225 36.365,90.865 ; J2.5@36.151,90.506 ccw(c35.957,90.865) 36.365,90.865 ; J2.5@36.151,90.506 ccw(c35.957,90.865) 36.365,90.865 ; J2.5@36.151,90.506 ccw(c35.957,90.865) 36.365,90.865 ; J2.5@36.215,90.11 cw(c37.676,90.11) 36.643,91.143 ; J2.5@36.215,90.11 cw(c37.676,90.11) 36.643,91.143 ; J2.5@36.215,90.11 cw(c37.676,90.11) 36.643,91.143 ; 36.365,90.865 ccw(c36.773,90.865) J2.5@36.579,90.506 ; 36.365,90.865 ccw(c36.773,90.865) J2.5@36.579,90.506 ; 36.365,90.865 ccw(c36.773,90.865) J2.5@36.579,90.506 ; J2.5@36.44,89.98 ccw(c35.879,90.952) 36.963,90.661 ; J2.5@36.44,89.98 ccw(c35.879,90.952) 36.963,90.661 ; J2.5@36.44,89.98 ccw(c35.879,90.952) 36.963,90.661 ; J2.5@36.815,90.11 cw(c39.724,90.11) 37.667,92.167 ; J2.5@36.815,90.11 cw(c39.724,90.11) 37.667,92.167 ; J2.5@36.815,90.11 cw(c39.724,90.11) 37.667,92.167 ; U3.8@44.015,73.64 ccw(c44.015,74.726) 44.783,73.958 ; U3.8@44.015,73.64 ccw(c44.015,74.726) 44.783,73.958 ; U3.8@44.015,73.64 ccw(c44.015,74.726) 44.783,73.958 ; U3.8@44.465,73.19 cw(c45.551,73.19) 44.783,73.958 ; U3.8@44.465,73.19 cw(c45.551,73.19) 44.783,73.958 ; U3.8@44.465,73.19 cw(c45.551,73.19) 44.783,73.958
RS232_TX_MONITOREO: J1.8 U3.14 | length 30.8
  Bottom Layer w0.6: J1.8@13.555,87.57 17.651,83.474 28.651,83.474 U3.14@31.315,80.81 ; J1.8@13.555,87.12 cw(c13.555,86.034) 14.323,86.802 ; J1.8@13.555,87.12 cw(c13.555,86.034) 14.323,86.802 ; J1.8@13.555,87.12 cw(c13.555,86.034) 14.323,86.802 ; J1.8@14.005,87.57 ccw(c15.091,87.57) 14.323,86.802 ; J1.8@14.005,87.57 ccw(c15.091,87.57) 14.323,86.802 ; J1.8@14.005,87.57 ccw(c15.091,87.57) 14.323,86.802 ; 30.547,81.578 cw(c29.779,80.81) U3.14@30.865,80.81 ; 30.547,81.578 ccw(c31.315,82.346) U3.14@31.315,81.26 ; 30.547,81.578 ccw(c31.315,82.346) U3.14@31.315,81.26 ; 30.547,81.578 cw(c29.779,80.81) U3.14@30.865,80.81 ; 30.547,81.578 ccw(c31.315,82.346) U3.14@31.315,81.26 ; 30.547,81.578 cw(c29.779,80.81) U3.14@30.865,80.81
RS232_TXPC: J2.8 U3.7 | length 57
  Top Layer w0.6: J2.8@32.555,87.57 32.555,87.295 35.175,84.675 43.075,84.675 46.05,81.7 46.05,78.7 41.475,74.125 ; U3.7@41.475,73.19 41.475,74.125 ; U3.7@41.903,73.328 cw(c43.022,73.689) 42.191,74.521 ; J2.8@33.005,87.57 ccw(c34.755,87.57) 33.518,86.332 ; J2.8@33.005,87.57 ccw(c34.755,87.57) 33.518,86.332 ; J2.8@33.005,87.57 ccw(c34.755,87.57) 33.518,86.332 ; U3.7@41.194,73.542 ccw(c40.729,74.125) 41.475,74.125 ; U3.7@41.194,73.542 ccw(c40.729,74.125) 41.475,74.125 ; U3.7@41.194,73.542 ccw(c40.729,74.125) 41.475,74.125 ; U3.7@41.25,73.58 ccw(c39.965,75.806) 42.448,75.141 ; U3.7@41.25,73.58 ccw(c39.965,75.806) 42.448,75.141 ; U3.7@41.25,73.58 ccw(c39.965,75.806) 42.448,75.141 ; U3.7@41.325,73.19 cw(c43.22,73.19) 41.88,74.53 ; U3.7@41.325,73.19 cw(c43.22,73.19) 41.88,74.53 ; U3.7@41.325,73.19 cw(c43.22,73.19) 41.88,74.53 ; 41.475,74.125 ccw(c42.221,74.125) U3.7@41.756,73.542 ; 41.475,74.125 ccw(c42.221,74.125) U3.7@41.756,73.542 ; 41.475,74.125 ccw(c42.221,74.125) U3.7@41.756,73.542 ; U3.7@41.55,73.06 ccw(c40.989,74.032) 42.073,73.741 ; U3.7@41.55,73.06 ccw(c40.989,74.032) 42.073,73.741 ; U3.7@41.55,73.06 ccw(c40.989,74.032) 42.073,73.741 ; U3.7@41.925,73.19 cw(c45.269,73.19) 42.904,75.554 ; U3.7@41.925,73.19 cw(c45.269,73.19) 42.904,75.554 ; U3.7@41.925,73.19 cw(c45.269,73.19) 42.904,75.554
RX_BT: H1.2 U1.22 | length 50.7
  Top Layer w0.6: H1.2@54.835,97.6 54.835,94.565 60.225,89.175 60.225,76.175 ; U1.22@62.51,74.87 61.53,74.87 ; H1.2@54.508,96.369 cw(c53.72,95.581) 54.835,95.581 ; H1.2@54.508,96.369 cw(c53.72,95.581) 54.835,95.581 ; H1.2@54.508,96.369 cw(c53.72,95.581) 54.835,95.581 ; 54.835,95.581 cw(c55.95,95.581) H1.2@55.162,96.369 ; 54.835,95.581 cw(c55.95,95.581) H1.2@55.162,96.369 ; 54.835,95.581 cw(c55.95,95.581) H1.2@55.162,96.369 ; 60.225,76.175 ccw(c62.304,78.254) U1.22@62.483,75.319 ; 60.225,76.175 ccw(c62.304,78.254) U1.22@62.483,75.319 ; 60.225,76.175 ccw(c62.304,78.254) U1.22@62.483,75.319 ; 60.225,76.175 61.53,74.87 ; 61.167,75.233 ccw(c62.412,76.478) U1.22@62.519,74.72 ; 61.167,75.233 ccw(c62.412,76.478) U1.22@62.519,74.72 ; 61.167,75.233 ccw(c62.412,76.478) U1.22@62.519,74.72 ; 61.53,74.87 cw(c61.53,74.028) U1.22@62.169,74.577 ; 61.53,74.87 ccw(c61.53,75.712) U1.22@62.169,75.163 ; 61.53,74.87 ccw(c61.53,75.712) U1.22@62.169,75.163 ; 61.53,74.87 cw(c61.53,74.028) U1.22@62.169,74.577 ; 61.53,74.87 ccw(c61.53,75.712) U1.22@62.169,75.163 ; 61.53,74.87 cw(c61.53,74.028) U1.22@62.169,74.577 ; 61.923,75.433 cw(c61.699,74.334) U1.22@62.635,74.953 ; 61.923,75.433 cw(c61.699,74.334) U1.22@62.635,74.953 ; 61.923,75.433 cw(c61.699,74.334) U1.22@62.635,74.953
STATE_BT: H1.1 U1.26 | length 50.7
  Top Layer w0.4: H1.1@52.295,96.95 50.4,96.95 46.875,93.425 46.875,87.2 48.675,85.4 51.275,85.4 52.85,83.825 58.775,83.825 v1(58.925,83.675) ; 50.938,96.95 cw(c50.938,95.593) H1.1@51.898,96.553 ; 50.938,96.95 ccw(c50.938,98.307) H1.1@51.898,97.347 ; 50.938,96.95 ccw(c50.938,98.307) H1.1@51.898,97.347 ; 50.938,96.95 cw(c50.938,95.593) H1.1@51.898,96.553 ; 50.938,96.95 ccw(c50.938,98.307) H1.1@51.898,97.347 ; 50.938,96.95 cw(c50.938,95.593) H1.1@51.898,96.553 ; 57.513,83.825 cw(c57.513,82.263) v1@58.617,83.367 ; 57.513,83.825 cw(c57.513,82.263) v1@58.617,83.367 ; 57.513,83.825 cw(c57.513,82.263) v1@58.617,83.367 ; 58.237,83.825 ccw(c58.237,84.363) v1@58.617,83.983 ; 58.237,83.825 ccw(c58.237,84.363) v1@58.617,83.983 ; 58.237,83.825 ccw(c58.237,84.363) v1@58.617,83.983
  Bottom Layer w0.6: v1(58.925,83.675) 58.925,83.921 60.034,85.03 U1.26@62.51,85.03 ; v1@59.26,83.675 cw(c60.663,83.675) 59.671,84.667 ; v1@59.26,83.675 cw(c60.663,83.675) 59.671,84.667 ; v1@59.26,83.675 cw(c60.663,83.675) 59.671,84.667 ; 61.424,85.03 cw(c61.424,83.944) U1.26@62.192,84.712 ; 61.424,85.03 ccw(c61.424,86.116) U1.26@62.192,85.348 ; 61.424,85.03 ccw(c61.424,86.116) U1.26@62.192,85.348 ; 61.424,85.03 cw(c61.424,83.944) U1.26@62.192,84.712 ; 61.424,85.03 ccw(c61.424,86.116) U1.26@62.192,85.348 ; 61.424,85.03 cw(c61.424,83.944) U1.26@62.192,84.712
TTL_RX1: U1.28 U3.9 | length 54.8
  Top Layer w0.6: v1(50.85,86.6) 51.075,86.6 52,87.525 52,90.161 53.714,91.875 55.9,91.875 58.953,88.822 v1(58.953,86.553) ; v1@50.85,86.935 ccw(c50.85,88.287) 51.806,87.331 ; v1@50.85,86.935 ccw(c50.85,88.287) 51.806,87.331 ; v1@50.85,86.935 ccw(c50.85,88.287) 51.806,87.331 ; v1@58.716,86.789 ccw(c58.144,87.361) 58.953,87.361 ; v1@58.716,86.789 ccw(c58.144,87.361) 58.953,87.361 ; v1@58.716,86.789 ccw(c58.144,87.361) 58.953,87.361 ; 58.953,87.361 ccw(c59.761,87.361) v1@59.189,86.789 ; 58.953,87.361 ccw(c59.761,87.361) v1@59.189,86.789 ; 58.953,87.361 ccw(c59.761,87.361) v1@59.189,86.789
  Bottom Layer w0.6: U3.9@44.015,80.81 44.015,83.19 47.5,86.675 v1@51.075,86.675 ; v1(58.953,86.553) U1.28@62.51,90.11 ; U3.9@43.697,81.128 ccw(c42.929,81.896) 44.015,81.896 ; U3.9@43.697,81.128 ccw(c42.929,81.896) 44.015,81.896 ; U3.9@43.697,81.128 ccw(c42.929,81.896) 44.015,81.896 ; 44.015,81.896 ccw(c45.101,81.896) U3.9@44.333,81.128 ; 44.015,81.896 ccw(c45.101,81.896) U3.9@44.333,81.128 ; 44.015,81.896 ccw(c45.101,81.896) U3.9@44.333,81.128 ; 49.86,86.675 cw(c49.86,85.61) v1@50.613,86.363 ; 49.86,86.675 cw(c49.86,85.61) v1@50.613,86.363 ; 49.86,86.675 cw(c49.86,85.61) v1@50.613,86.363 ; v1@58.953,86.888 ccw(c58.953,87.696) 59.524,87.124 ; v1@58.953,86.888 ccw(c58.953,87.696) 59.524,87.124 ; v1@58.953,86.888 ccw(c58.953,87.696) 59.524,87.124 ; v1@59.288,86.553 cw(c60.096,86.553) 59.524,87.124 ; v1@59.288,86.553 cw(c60.096,86.553) 59.524,87.124 ; v1@59.288,86.553 cw(c60.096,86.553) 59.524,87.124 ; 61.742,89.342 cw(c62.51,88.574) U1.28@62.51,89.66 ; 61.742,89.342 ccw(c60.974,90.11) U1.28@62.06,90.11 ; 61.742,89.342 ccw(c60.974,90.11) U1.28@62.06,90.11 ; 61.742,89.342 cw(c62.51,88.574) U1.28@62.51,89.66 ; 61.742,89.342 ccw(c60.974,90.11) U1.28@62.06,90.11 ; 61.742,89.342 cw(c62.51,88.574) U1.28@62.51,89.66
TTL_RX2: U1.2 U3.12 | length 35.6
  Bottom Layer w0.6: U3.12@36.395,80.81 44.76,89.175 52.8,89.175 54.405,87.57 U1.2@54.89,87.57 ; U3.12@36.395,81.26 ccw(c36.395,82.346) 37.163,81.578 ; U3.12@36.395,81.26 ccw(c36.395,82.346) 37.163,81.578 ; U3.12@36.395,81.26 ccw(c36.395,82.346) 37.163,81.578 ; U3.12@36.845,80.81 cw(c37.931,80.81) 37.163,81.578 ; U3.12@36.845,80.81 cw(c37.931,80.81) 37.163,81.578 ; U3.12@36.845,80.81 cw(c37.931,80.81) 37.163,81.578 ; 53.294,88.681 ccw(c54.89,90.277) U1.2@54.89,88.02 ; 53.294,88.681 ccw(c54.89,90.277) U1.2@54.89,88.02 ; 53.294,88.681 ccw(c54.89,90.277) U1.2@54.89,88.02 ; 54.369,88.16 cw(c54.098,87.148) U1.2@55.022,87.641 ; 54.369,88.16 cw(c54.098,87.148) U1.2@55.022,87.641 ; 54.369,88.16 cw(c54.098,87.148) U1.2@55.022,87.641
TTL_TX1: U1.27 U3.10 | length 87.3
  Top Layer w0.6: U3.10@41.475,80.81 41.475,82.2 40.557,83.118 34.007,83.118 29.925,87.2 29.925,91.125 37.875,99.075 67.2,99.075 68.875,97.4 68.875,89.332 67.113,87.57 U1.27@62.51,87.57 ; U3.10@41.157,81.128 ccw(c40.389,81.896) 41.475,81.896 ; U3.10@41.157,81.128 ccw(c40.389,81.896) 41.475,81.896 ; U3.10@41.157,81.128 ccw(c40.389,81.896) 41.475,81.896 ; 41.475,81.896 ccw(c42.561,81.896) U3.10@41.793,81.128 ; 41.475,81.896 ccw(c42.561,81.896) U3.10@41.793,81.128 ; 41.475,81.896 ccw(c42.561,81.896) U3.10@41.793,81.128 ; U1.27@62.828,87.252 cw(c63.596,86.484) 63.596,87.57 ; U1.27@62.828,87.252 cw(c63.596,86.484) 63.596,87.57 ; U1.27@62.828,87.252 cw(c63.596,86.484) 63.596,87.57 ; U1.27@62.828,87.888 ccw(c63.596,88.656) 63.596,87.57 ; U1.27@62.828,87.888 ccw(c63.596,88.656) 63.596,87.57 ; U1.27@62.828,87.888 ccw(c63.596,88.656) 63.596,87.57
TTL_TX2: U1.3 U3.11 | length 28.6
  Bottom Layer w0.6: U3.11@38.935,80.81 39.26,80.81 46.3,87.85 52.325,87.85 54.89,85.285 U1.3@54.89,85.03 ; U3.11@38.935,81.26 ccw(c38.935,83.131) 40.258,81.808 ; U3.11@38.935,81.26 ccw(c38.935,83.131) 40.258,81.808 ; U3.11@38.935,81.26 ccw(c38.935,83.131) 40.258,81.808 ; 53.942,86.233 cw(c52.738,85.03) U1.3@54.44,85.03 ; 53.942,86.233 cw(c52.738,85.03) U1.3@54.44,85.03 ; 53.942,86.233 cw(c52.738,85.03) U1.3@54.44,85.03
TX_BT: H1.3 U1.23 | length 34.9
  Top Layer w0.6: H1.3@57.375,97.6 57.375,93.736 61.125,89.986 61.125,78.375 ; U1.23@62.51,77.41 62.09,77.41 61.125,78.375 ; H1.3@57.048,96.369 cw(c56.26,95.581) 57.375,95.581 ; H1.3@57.048,96.369 cw(c56.26,95.581) 57.375,95.581 ; H1.3@57.048,96.369 cw(c56.26,95.581) 57.375,95.581 ; 57.375,95.581 cw(c58.49,95.581) H1.3@57.702,96.369 ; 57.375,95.581 cw(c58.49,95.581) H1.3@57.702,96.369 ; 57.375,95.581 cw(c58.49,95.581) H1.3@57.702,96.369 ; 61.125,78.375 ccw(c62.378,79.628) U1.23@62.483,77.859 ; 61.125,78.375 ccw(c62.378,79.628) U1.23@62.483,77.859 ; 61.125,78.375 ccw(c62.378,79.628) U1.23@62.483,77.859 ; 61.951,77.968 cw(c61.739,76.934) U1.23@62.638,77.489 ; 61.951,77.968 cw(c61.739,76.934) U1.23@62.638,77.489 ; 61.951,77.968 cw(c61.739,76.934) U1.23@62.638,77.489
pads on no net: J1.3 J1.4 J1.MH1 J1.MH2 J2.3 J2.4 J2.MH1 J2.MH2 P1.1@40.8,11.9 P1.1@70.3,11.9 P2.1@77.41,7.95 P2.1@77.41,37.45 P3.1@11.971,51.934 P3.1@11.971,81.434 U1.11 U1.12 U1.14 U5.3 U5.6 U6.3 U6.6 U7.3 U7.6 U8.3 U8.6 U9.3 U9.6 U11.3 U11.6

## Polygon pours and split planes (outlines as drawn)
GND on Bottom Layer "poligono gnd botton" (solid, pour order 6): 0,100 90,100 90,0 0,0
GND on Top Layer "poligono gnd top" (solid, pour order 4): -0.025,100.025 0,100 90,100 90,0 0,0

## Other copper
Top Layer:
  rectangle net GND: 0.05,34.2 9.025,49.7

## Silkscreen, mask and mechanical layers (free items; w line width, h text height)
Top Overlay:
  drawing of 347 lines, arcs and shapes, not listed
  text "D@." at 83.9,88.95 h3

## Text inside footprints (layer, text, board x,y; h text height)
D5: Top Overlay "+" at 43.285,40.775 h0.8
D7: Top Overlay "+" at 71.785,23.25 h0.8 r90
D8: Top Overlay "+" at 61.76,23.25 h0.8 r90
D9: Top Overlay "+" at 79.575,96.475 h0.8
D10: Top Overlay "+" at 79.575,90.6 h0.8
D11: Top Overlay "+" at 79.575,84.725 h0.8
U10: Top Overlay "5" at 17.275,45.04 h1.27 r90; Top Overlay "1" at 17.275,39.452 h1.27 r90